# Altium PCB PCB1.PcbDoc (part 1 of 2)
Units mil, origin at the board's own origin, x right, y up, seen from the top; angles counter-clockwise.
Board outline 1771.65 x 629.92 mil, 4 copper layers (L1, L2, L3, L4), stack 61.583 mil thick; 35 components, 23 nets, 151 pads, 78 vias.
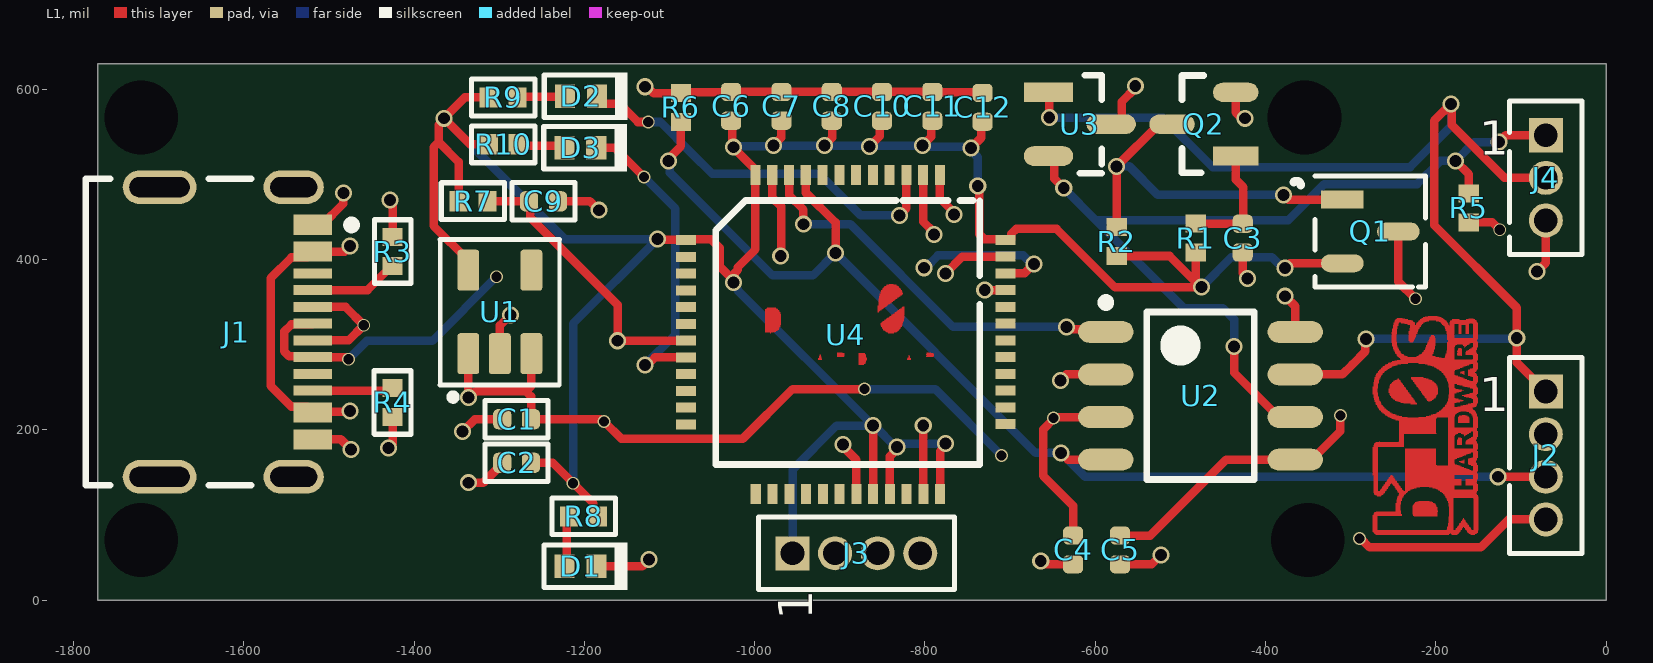
[diagram p0: L1 view]
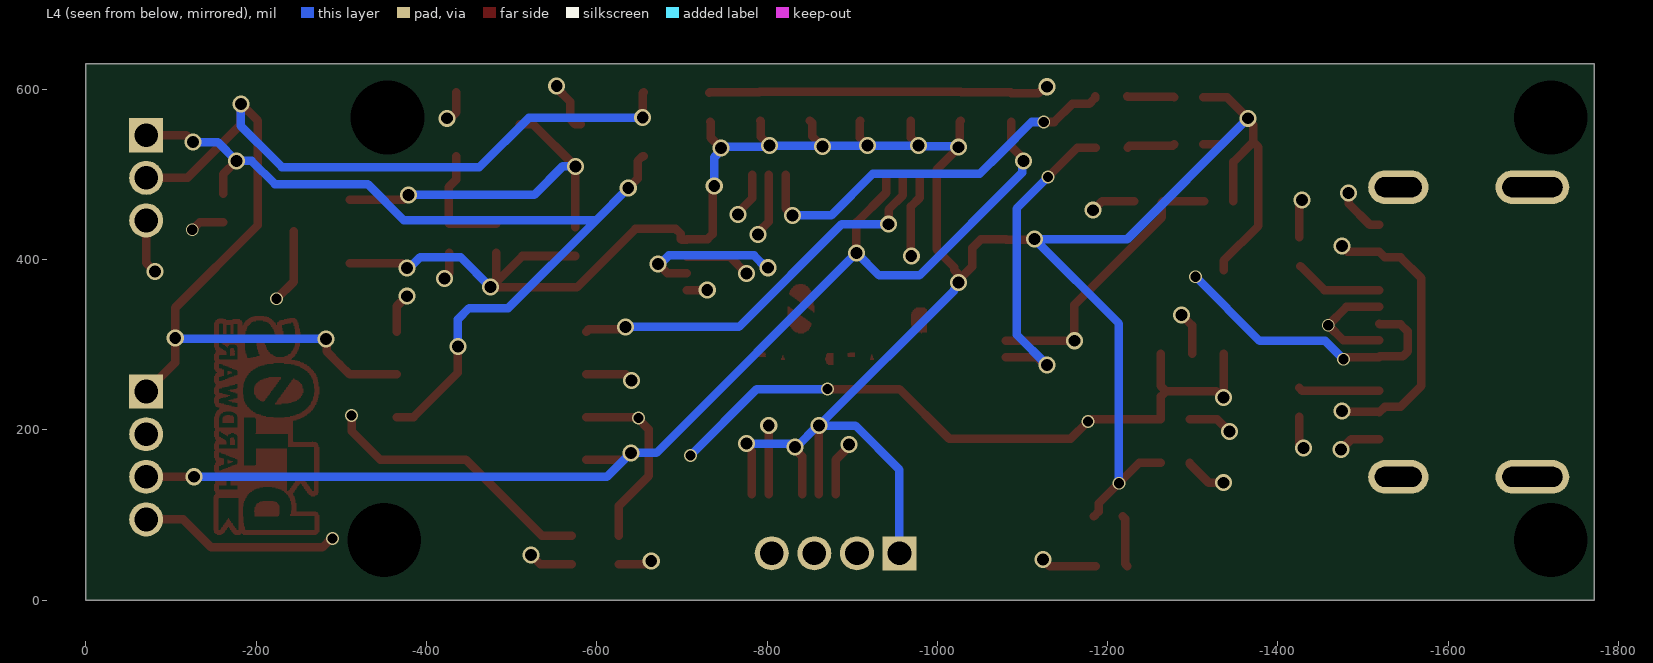
[diagram p1: L4 view, seen from below]
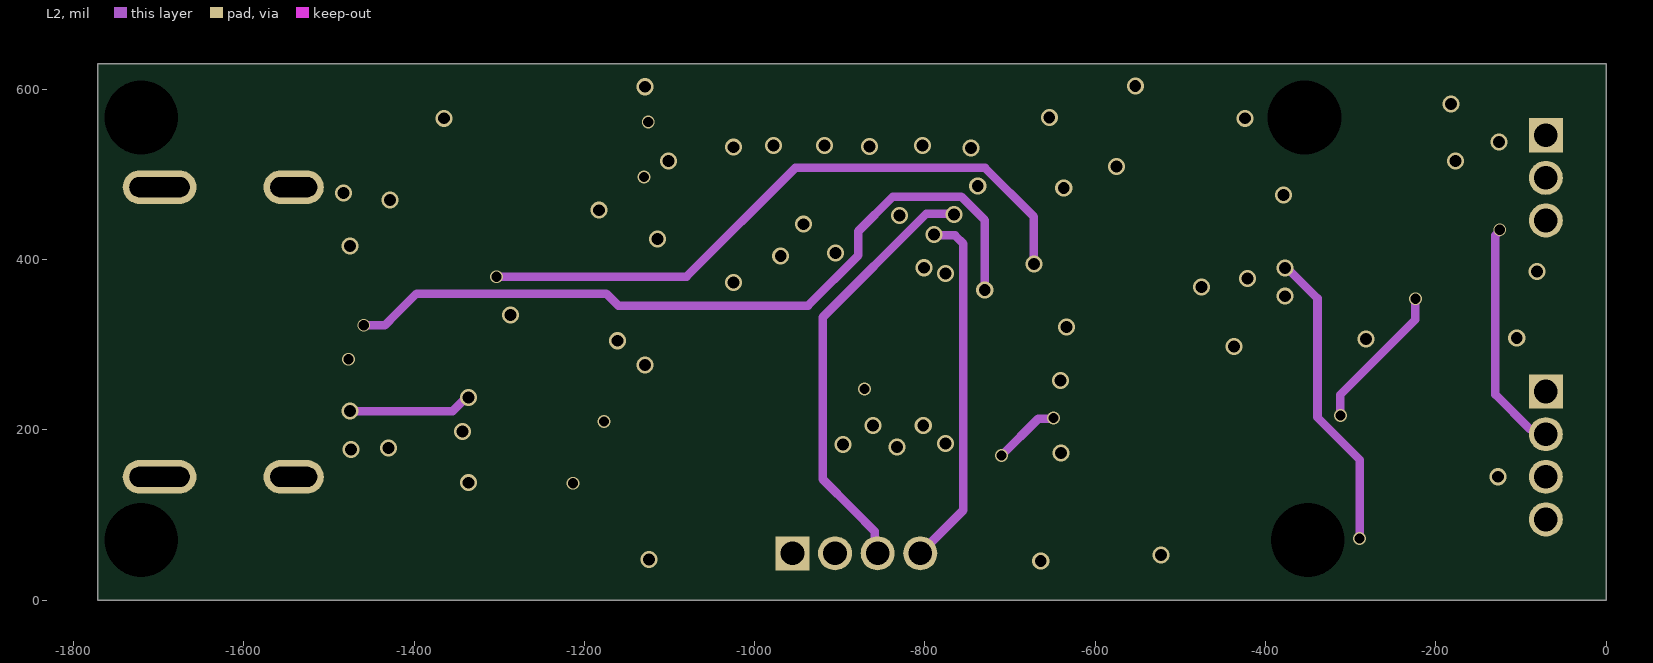
[diagram p2: L2]
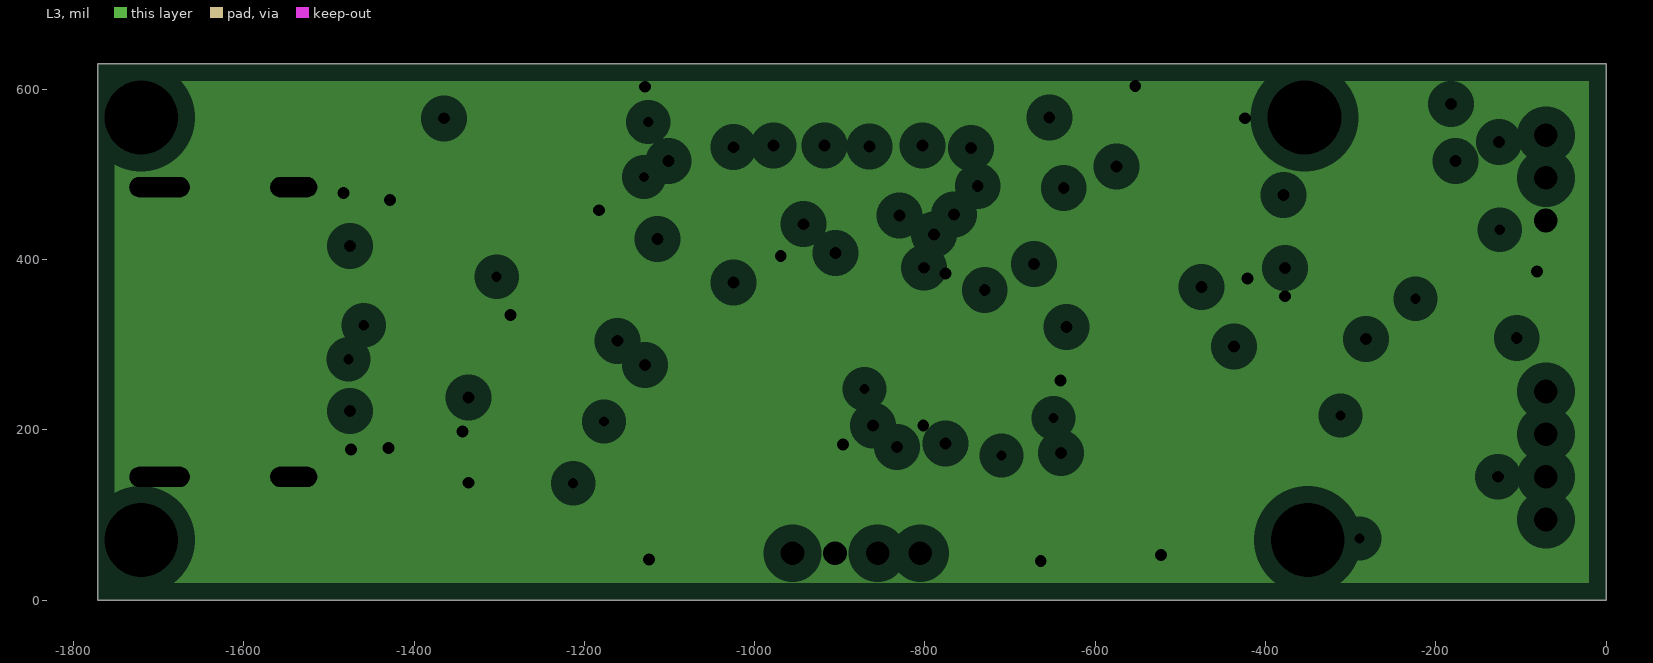
[diagram p3: L3, clearances drawn from the general rule]
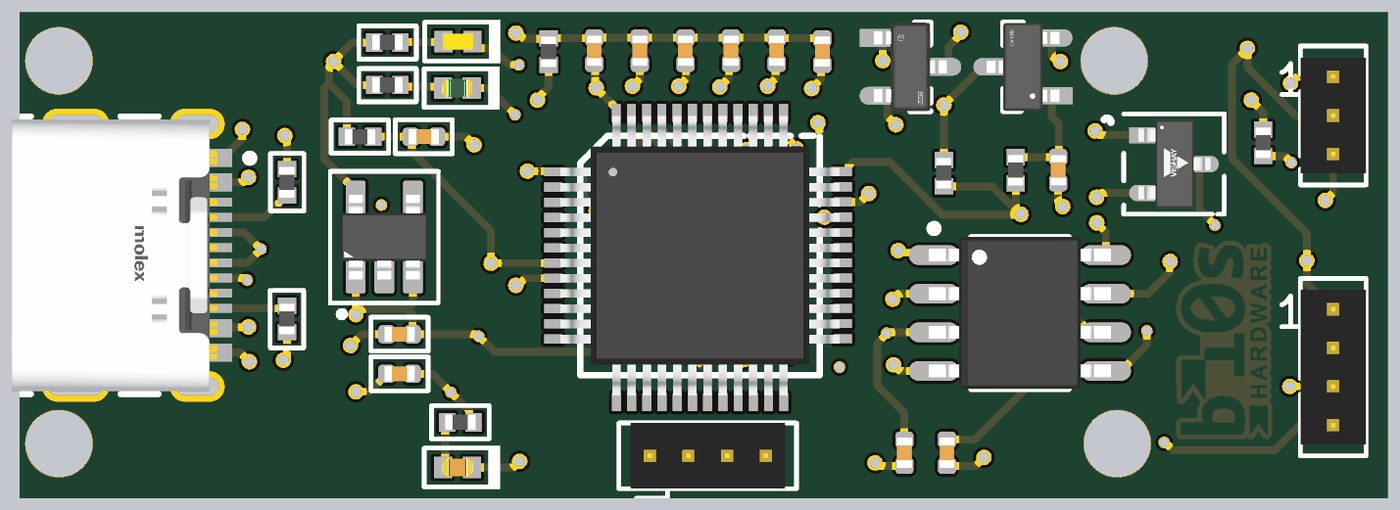
[diagram p4: 3D render of the assembled board from above, using the file's embedded part models]

## Layer stack, top to bottom
Top Solder: solder mask 0.4, Solder Resist, Dk 3.5
L1: signal copper 1.378
Dielectric 2: prepreg 3.9134, PP-006, Dk 4.1
L2: signal copper 0.5984
Dielectric 1: dielectric 49.8031, FR-4, Dk 4.8
L3: plane copper 0.5984, net GND
Dielectric 3: prepreg 3.9134, PP-006, Dk 4.1
L4: signal copper 1.378
Bottom Solder: solder mask 0.4, Solder Resist, Dk 3.5

## Board outline
-1771.65,0 -1771.65,629.92 0,629.92 0,0

## Design rules (kind name [scope] priority, off if disabled: settings)
Clearance Clearance_1 [WithinRoom('Stm32') or WithinRoom('Type C')] p1: gap=6 ignorepadtopadclearanceinfootprint=FALSE
Clearance [All] p2: gap=10 ignorepadtopadclearanceinfootprint=FALSE
PlaneClearance [All] p1: clearance=20
PlaneConnect [All] p1: planeconnectstyle=Relief reliefexpansion=20 reliefentries=4 reliefconductorwidth=10 reliefairgap=10
PolygonConnect [All] p1: connectstyle=Relief reliefconductorwidth=10 reliefentries=4 polygonreliefangle="90 Angle" airgapwidth=10
RoomDefinition "Type C" [False vs False] p1: confinementstyle=ConfineIn formatcopy=TRUE lockcomponents=FALSE outline -1570,509 -1421,509 -1421,127 -1570,127
RoomDefinition Stm32 [False vs False] p2: confinementstyle=ConfineIn formatcopy=TRUE lockcomponents=FALSE outline -1161.03,525 -655,525 -655,106 -1161.03,106
RoutingVias [All] p1: holewidth=28 width=50 viastyle="Through Hole" minholewidth=28 minwidth=50 maxholewidth=28 maxwidth=50
SolderMaskExpansion [All] p1: expansion=4 istentingtop=FALSE
SupplyNets "Schematic Supply Nets_3" [InNet('GND')] p1: voltage=0.000
SupplyNets "Schematic Supply Nets_2" [InNet('5V')] p2: voltage=0.000
SupplyNets "Schematic Supply Nets_1" [InNet('3.3V')] p3: voltage=0.000
SupplyNets "Schematic Supply Nets" [InNet('3.3V-CAN')] p4: voltage=0.000
Width [All] p1: maxlimit=10 minlimit=10 preferedwidth=10
28 further rules are at their usual default settings.

## Components (designator, comment, footprint, x,y, rotation, side; value= is the part's Value field where it differs from the comment)
C1 "1uF" CAPC1005X55N -1279.53,212.6 r0 top locked
C2 "1uF" CAPC1005X55N -1279.53,161.42 r0 top locked
C3 "22uF" CAPC1005X55N -426.82,425.2 r90 top
C4 "100nF" CAPC1005X55N -625.98,59.06 r90 top
C5 "100nF" CAPC1005X55N -570.87,59.06 r90 top
C6 "100nF" CAPC1005X55N -1027.56,580 r270 top
C7 "100nF" CAPC1005X55N -968.5,580 r270 top
C8 "100nF" CAPC1005X55N -909.45,580 r270 top
C9 "100nF" CAPC1005X55N -1248.03,468.5 r180 top locked
C10 "100nF" CAPC1005X55N -850.39,580 r270 top
C11 "100nF" CAPC1005X55N -791.34,580 r270 top
C12 "100nF" CAPC1005X55N -732.28,578.82 r270 top
D1 "RED" LED0402R -1204.57,39.98 r180 top locked
D2 "BLUE" LED0402B -1164.03,681.76 r180 top locked
D3 "GREEN" LED0402G -1204.72,531.5 r180 top locked
J1 "217179-0001" FP-2171790001-MFG -1653.54,314.96 r270 top locked
J2 "Header 4" HDR_1X4_1.27MM -70.87,244.96 r0 top
J3 "Header 4" HDR_1X4_1.27MM -955.51,55.12 r90 top locked
J4 "Header 3" HDR_1X3_1.27MM -70.87,546.06 r0 top
Q1 "SI2301" FP-S-03946-IPC_C -276.97,433.07 r0 top
Q2 "SS8050" FP-SS8050-G-IPC_B -472.44,559.06 r180 top
R1 "1M" RESC1005X37N -481.94,425.2 r270 top value=1MR
R2 "100K" RESC1005X37N -574.8,421.26 r270 top value=100kR
R3 "5K1" RESC1005X37N -1425.2,409.45 r90 top locked value=5.1kR
R4 "5K1" RESC1005X37N -1425.2,232.28 r270 top locked value=5.1kR
R5 "120R" RESC1005X37N -161.42,460.63 r270 top
R6 "10K" RESC1005X37N -1086.61,578.74 r90 top value=10kR
R7 "10K" RESC1005X37N -1330.71,468.5 r180 top locked value=10kR
R8 "1K" RESC1005X37N -1200.79,98.43 r180 top locked value=1kR
R9 "1K" RESC1005X37N -1295.28,590.55 r0 top locked value=1kR
R10 "1K" RESC1005X37N -1295.28,535.43 r0 top locked value=1kR
U1 "RT9013-33GB" RT9013-33GB -1299.21,338.58 r90 top locked
U2 "TJA1051T/3" NXP-SOIC-8_M -476.38,240.16 r0 top
U3 "ESDA6V1L-TP" FP-SOT-23-IPC_B -618.11,559.06 r0 top
U4 "STM32G431C8T6" STM32 -890.58,314.55 r0 top

## Footprints (in the part's own frame and the unit in brackets; to place one, negate y for a bottom-side part, rotate by r counter-clockwise, add the part's x,y. Pads: shape width x height; smd on the part's side, far side on the other; paste and mask are expansions set on the pad)
CAPC1005X55N [mm]
  rrect53% 0.54x0.6 smd: 1(-0.43,0) 2(0.43,0)
  silkscreen extent -0.94,-0.56 0.94,0.56, body extent -0.5,-0.25 0.5,0.25, height 0.55
FP-2171790001-MFG [mm]
  rect 0.6x1.15 smd paste+0 mask+0: A1B12(-3.2,3.425) A4B9(-2.4,3.425) B1A12(3.2,3.425) B4A9(2.4,3.425)
  rect 0.3x1.15 smd paste+0 mask+0: A5(-1.25,3.425) A6(-0.25,3.425) A7(0.25,3.425) A8(1.25,3.425) B5(1.75,3.425) B6(0.75,3.425) B7(-0.75,3.425) B8(-1.75,3.425)
  rrect100% 1x1.8 hole 1.4 slot 0.6 at 0 deg paste-2539.97 mask+0: S1(-4.32,2.85) S2(4.32,2.85)
  rrect100% 1x2.2 hole 1.8 slot 0.6 at 0 deg paste-2539.97 mask+0: S3(-4.32,-1.15) S4(4.32,-1.15)
  silkscreen extent -4.57,-3.35 4.57,4.7, body extent -4.92,-3.45 4.92,4.1, height 0.25
FP-S-03946-IPC_C [mm]
  rect 1.274x0.536 smd paste+0 mask+0: 1(-0.835,0.95)
  rrect100% 1.274x0.536 smd paste+0 mask+0: 2(-0.835,-0.95) 3(0.835,0)
  silkscreen extent -2.29,-1.65 1.65,1.65, body extent -1.57,-1.56 1.57,1.56, height 0.25
FP-SOT-23-IPC_B [mm]
  rect 1.474x0.585 smd paste+0 mask+0: 1(-0.935,0.95)
  rrect100% 1.474x0.585 smd paste+0 mask+0: 2(-0.935,-0.95) 3(0.935,0)
  silkscreen extent 0,-1.46 0.65,1.46, body extent -1.92,-1.71 1.92,1.71, height 0.25
FP-SS8050-G-IPC_B [mm]
  rect 1.357x0.572 smd paste+0 mask+0: 1(-0.951,0.95)
  rrect100% 1.357x0.572 smd paste+0 mask+0: 2(-0.951,-0.95) 3(0.951,0)
  silkscreen extent 0,-1.45 0.65,1.45, body extent -1.88,-1.7 1.88,1.7, height 0.25
HDR_1X3_1.27MM [mil]
  rect 40x40 hole 28: 1(0,0)
  round 40 hole 28: 2(0,-50) 3(0,-100)
  silkscreen extent -42,-140 42,40, body extent -42,-125 42,25, height 154
HDR_1X4_1.27MM [mil]
  rect 40x40 hole 28: 1(0,0)
  round 40 hole 28: 2(0,-50) 3(0,-100) 4(0,-150)
  silkscreen extent -42,-190 42,40, body extent -42,-175 42,25, height 154
LED0402B [mm]
  rect 0.6x0.7 smd: 1(0.541,2.286) 2(1.491,2.286)
  silkscreen extent -0.38,1.57 2.11,3, body extent 0.52,2.04 1.52,2.54, height 0.32
LED0402G [mm]
  rect 0.6x0.7 smd: 1(-0.475,0) 2(0.475,0)
  silkscreen extent -1.4,-0.71 1.09,0.71, body extent -0.5,-0.3 0.5,0.3, height 0.2
LED0402R [mm]
  rect 0.6x0.7 smd: 1(-0.475,0) 2(0.475,0)
  silkscreen extent -1.4,-0.71 1.09,0.71, body extent -0.5,-0.3 0.5,0.3, height 0.2
NXP-SOIC-8_M [mm] "SOIC, 8-Leads, Body 5x4mm, Pitch 1.27mm, IPC Low Density"
  oval 1.65x0.65 smd: 1(-2.825,1.905) 2(-2.825,0.635) 3(-2.825,-0.635) 4(-2.825,-1.905) 5(2.825,-1.905) 6(2.825,-0.635) 7(2.825,0.635) 8(2.825,1.905)
  silkscreen extent -2.95,-2.5 1.6,2.9, body extent -3,-2.5 3,2.5, height 1.75
RESC1005X37N [mm]
  rect 0.54x0.6 smd: 1(-0.432,0) 2(0.432,0)
  body extent -0.5,-0.25 0.5,0.25, height 0.37
RT9013-33GB [mm]
  rrect25% 1.22x0.65 smd: 1(-1.245,0.94) 2(-1.245,0) 3(-1.245,-0.94) 4(1.245,-0.94) 5(1.245,0.94)
  silkscreen extent -2.64,-1.78 2.16,1.78, body extent -1.4,-1.45 1.4,1.45, height 1.3
STM32 [mm]
  rect 0.6x0.3 smd: 1(-4.826,2.754) 2(-4.826,2.254) 3(-4.826,1.754) 4(-4.826,1.254) 5(-4.826,0.754) 6(-4.826,0.254) 7(-4.826,-0.246) 8(-4.826,-0.746) 9(-4.826,-1.246) 10(-4.826,-1.746) 11(-4.826,-2.246) 12(-4.826,-2.746) 25(4.699,-2.738) 26(4.699,-2.238) 27(4.699,-1.738) 28(4.699,-1.238) 29(4.699,-0.738) 30(4.699,-0.238) 31(4.699,0.262) 32(4.699,0.762) 33(4.699,1.262) 34(4.699,1.762) 35(4.699,2.262) 36(4.699,2.762)
  rect 0.3x0.6 smd: 13(-2.746,-4.826) 14(-2.246,-4.826) 15(-1.746,-4.826) 16(-1.246,-4.826) 17(-0.746,-4.826) 18(-0.246,-4.826) 19(0.254,-4.826) 20(0.754,-4.826) 21(1.254,-4.826) 22(1.754,-4.826) 23(2.254,-4.826) 24(2.754,-4.826) 37(2.746,4.699) 38(2.246,4.699) 39(1.746,4.699) 40(1.246,4.699) 41(0.746,4.699) 42(0.246,4.699) 43(-0.254,4.699) 44(-0.754,4.699) 45(-1.254,4.699) 47(-2.254,4.699) 48(-2.754,4.699) sS(-1.754,4.699)
  silkscreen extent -3.94,-3.94 3.94,3.94, body extent -4.6,-4.6 4.6,4.6, height 1.6

## Part data
C1 C2: "Ceramic Capacitor, Multilayer, Ceramic, 50V, 10% +Tol, 10% -Tol, X7R, 15% TC, 1uF, Surface Mount, 1206", Capacitor Type=Ceramic, Case/Package=1206, Manufacturer=KEMET, Manufacturer Part Number=C1206C105K5RACTU, Max Operating Temperature=125°C, Min Operating Temperature=-55°C, Package Shape=Rectangular, Package Style=SMTMeter, Rated DC Voltage (URdc)=50V, Supplier Part Number=399-C1206C105K5RAC7800CT-ND, Temperature Characteristics Code=X7R, Tolerance  (fill in as +-)=10%, Category="Ceramic Capacitors", ComponentLink1Description=https://datasheet.ciiva.com:443/pdfs/VipMasterIC/IC/KEME/KEME-S-A0008991654/KEME-S-A0008991654-1.pdf?src-supplier=IHS+Markit, ComponentLink1URL=https://datasheet.ciiva.com:443/pdfs/VipMasterIC/IC/KEME/KEME-S-A0008991654/KEME-S-A0008991654-1.pdf?src-supplier=IHS+Markit, ComponentLink2Description=https://datasheet.ciiva.com/6074/kem-c1002-x7r-smd-6074697.pdf?src-supplier=Farnell, ComponentLink2URL=https://datasheet.ciiva.com/6074/kem-c1002-x7r-smd-6074697.pdf?src-supplier=Farnell, ComponentLink3Description=https://datasheet.ciiva.com/7730/kem-c1002-x7r-smd-7730086.pdf?src-supplier=Element14, ComponentLink3URL=https://datasheet.ciiva.com/7730/kem-c1002-x7r-smd-7730086.pdf?src-supplier=Element14, ComponentLink4Description=https://datasheet.ciiva.com/22749/1918693-22749725.pdf?src-supplier=Element14, ComponentLink4URL=https://datasheet.ciiva.com/22749/1918693-22749725.pdf?src-supplier=Element14, Dielectric Material=Ceramic, Height=1mm, JESD-609 Code=e3, Length=3.2mm, Mounting Technology="Surface Mount", Multilayer=Yes, Packaging="Tape and Reel", Pins=2, Pricing="1=0.28, 10=0.182, 50=0.128, 100=0.1034, 500=0.07684, 1000=0.06724, 2500=0.06403, 5000=0.05923, 12500=0.05315, 25000=0.05123, 62500=0.04803, 125000=0.04242 (USD)", Reach SVHC Compliant=Yes, RoHS=Yes, RoHS Compliant=Yes, Stock=243208, Supplier=Digikey, Terminal Finish=Nickel, Termination=Wraparound, Tolerance (fill in as +-)=10%, Width=1.6mm
C3: "Ceramic Capacitor, Multilayer, Ceramic, 6.3V, 20% +Tol, 20% -Tol, X5R, 15% TC, 22uF, Surface Mount, 0805", Capacitor Type=Ceramic, Case/Package=0805, Manufacturer=Murata, Manufacturer Part Number=GRM21BR60J226ME39L, Max Operating Temperature=85°C, Min Operating Temperature=-55°C, Package Shape=Rectangular, Package Style=SMTMeter, Rated DC Voltage (URdc)=6.3V, Supplier Part Number=490-1719-1-ND, Temperature Characteristics Code=X5R, Tolerance  (fill in as +-)=20%, Category="Ceramic Capacitors", ComponentLink1Description=https://psearch.en.murata.com:443/capacitor/product/GRM21BR60J226ME39%23.pdf?src-supplier=IHS+Markit, ComponentLink1URL=https://psearch.en.murata.com:443/capacitor/product/GRM21BR60J226ME39%23.pdf?src-supplier=IHS+Markit, Dielectric Material=Ceramic, Height=1.25mm, JESD-609 Code=e3, Length=2mm, Mounting Technology="Surface Mount", Multilayer=Yes, Packaging="Tape and Reel", Pins=2, Pricing="1=0.34, 10=0.198, 50=0.1424, 100=0.1251, 500=0.0956, 1000=0.0864 (USD)", Reach SVHC Compliant=Yes, RoHS=Yes, RoHS Compliant=Yes, Stock=3492300, Supplier=Digikey, Terminal Finish=Nickel, Termination=Wraparound, Tolerance (fill in as +-)=20%, Width=1.25mm
C4 C5 C6 C7 C8 C9 C10 C11 C12: "Ceramic Capacitor, Multilayer, Ceramic, 10V, 10% +Tol, 10% -Tol, X5R, 15% TC, 0.1uF, Surface Mount, 0402", Capacitor Type=Ceramic, Case/Package=0402, Manufacturer=KEMET, Manufacturer Part Number=C0402C104K8PACTU, Max Operating Temperature=85°C, Min Operating Temperature=-55°C, Package Shape=Rectangular, Package Style=SMTMeter, Rated DC Voltage (URdc)=10V, Supplier Part Number=399-C0402C104K8PACTUCT-ND, Temperature Characteristics Code=X5R, Tolerance  (fill in as +-)=10%, Category="Ceramic Capacitors", ComponentLink1Description=https://datasheet.ciiva.com:443/pdfs/VipMasterIC/IC/KEME/KEME-S-A0008991665/KEME-S-A0008991665-1.pdf?src-supplier=IHS+Markit, ComponentLink1URL=https://datasheet.ciiva.com:443/pdfs/VipMasterIC/IC/KEME/KEME-S-A0008991665/KEME-S-A0008991665-1.pdf?src-supplier=IHS+Markit, ComponentLink2Description=https://datasheet.ciiva.com/144/docfinderpartnumber-c0402c104k8pactu-144097.pdf?src-supplier=Digikey, ComponentLink2URL=https://datasheet.ciiva.com/144/docfinderpartnumber-c0402c104k8pactu-144097.pdf?src-supplier=Digikey, ComponentLink3Description=https://datasheet.ciiva.com/7747/1776086-7747440.pdf?src-supplier=Element14, ComponentLink3URL=https://datasheet.ciiva.com/7747/1776086-7747440.pdf?src-supplier=Element14, ComponentLink4Description=https://datasheet.ciiva.com/28645/1789732-28645387.pdf?src-supplier=Element14, ComponentLink4URL=https://datasheet.ciiva.com/28645/1789732-28645387.pdf?src-supplier=Element14, ComponentLink5Description=https://datasheet.ciiva.com/14588/70095383-14588187.pdf?src-supplier=Allied+Electronics, ComponentLink5URL=https://datasheet.ciiva.com/14588/70095383-14588187.pdf?src-supplier=Allied+Electronics, ComponentLink6Description=https://datasheet.ciiva.com/14595/70095383-14595064.pdf?src-supplier=Allied+Electronics, ComponentLink6URL=https://datasheet.ciiva.com/14595/70095383-14595064.pdf?src-supplier=Allied+Electronics, Dielectric Material=Ceramic, Height=0.5mm, JESD-609 Code=e3, Length=1mm, Mounting Technology="Surface Mount", Multilayer=Yes, Packaging="Tape and Reel", Pins=2, Pricing="1=0.1, 10=0.035, 50=0.02, 100=0.0155, 500=0.01166, 1000=0.00917, 2500=0.00833, 5000=0.00767, 10000=0.007, 20000=0.00667, 30000=0.00633, 50000=0.00567, 100000=0.00458, 250000=0.00417 (USD)", Reach SVHC Compliant=Yes, RoHS=Yes, RoHS Compliant=Yes, Stock=507186, Supplier=Digikey, Terminal Finish=Nickel, Termination=Wraparound, Tolerance (fill in as +-)=10%, Width=0.5mm
D1: library part VLMS1500-GS08, "LED RED 0402 SMD", Color=Red, Forward Current=30mA, Forward Voltage=2.4V, LCSC Part Number=C511370, Manufacturer=Vishay, Max Operating Temperature=85°C, Min Operating Temperature=-30°C, Reverse Voltage-Max=5V, Supplier Part Number=VLMS1500-GS08CT-ND, Category=LEDs, Channels=1, Color@wavelength=Red, ComponentLink1Description=https://datasheet.ciiva.com:443/pdfs/VipMasterIC/IC/VISH/VISH-S-A0003457490/VISH-S-A0003457490-1.pdf?src-supplier=IHS+Markit, ComponentLink1URL=https://datasheet.ciiva.com:443/pdfs/VipMasterIC/IC/VISH/VISH-S-A0003457490/VISH-S-A0003457490-1.pdf?src-supplier=IHS+Markit, ComponentLink2Description=http://www.farnell.com/datasheets/1809983.pdf?src-supplier=Farnell, ComponentLink2URL=http://www.farnell.com/datasheets/1809983.pdf?src-supplier=Farnell, ComponentLink3Description=http://www.mouser.com/ds/2/427/vlmo1500-244705.pdf?src-supplier=Mouser, ComponentLink3URL=http://www.mouser.com/ds/2/427/vlmo1500-244705.pdf?src-supplier=Mouser, ComponentLink4Description=http://www.alliedelec.com/m/d/cfc385e1097fc985ee9a50a3551ac188.pdf?src-supplier=Allied+Electronics, ComponentLink4URL=http://www.alliedelec.com/m/d/cfc385e1097fc985ee9a50a3551ac188.pdf?src-supplier=Allied+Electronics, ComponentLink5Description=https://datasheet.octopart.com/VLMS1500-GS08-Vishay-datasheet-62332426.pdf?src-supplier=Newark, ComponentLink5URL=https://datasheet.octopart.com/VLMS1500-GS08-Vishay-datasheet-62332426.pdf?src-supplier=Newark, ComponentLink6Description=https://datasheet.octopart.com/VLMS1500-GS08-Vishay-datasheet-33014519.pdf?src-supplier=Element14, ComponentLink6URL=https://datasheet.octopart.com/VLMS1500-GS08-Vishay-datasheet-33014519.pdf?src-supplier=Element14, ComponentLink7Description=http://datasheet.octopart.com/VLMS1500-GS08-Vishay-datasheet-21227148.pdf?src-supplier=Avnet, ComponentLink7URL=http://datasheet.octopart.com/VLMS1500-GS08-Vishay-datasheet-21227148.pdf?src-supplier=Avnet, ComponentLink8Description=http://www.farnell.com/datasheets/1809983.pdf?src-supplier=Newark, ComponentLink8URL=http://www.farnell.com/datasheets/1809983.pdf?src-supplier=Newark, ComponentLink9Description=http://www.farnell.com/datasheets/2050839.pdf?src-supplier=Newark, ComponentLink9URL=http://www.farnell.com/datasheets/2050839.pdf?src-supplier=Newark, ComponentLink10Description=http://datasheet.octopart.com/VLMS1500-GS08-Vishay-datasheet-21227148.pdf?src-supplier=Quest, ComponentLink10URL=http://datasheet.octopart.com/VLMS1500-GS08-Vishay-datasheet-21227148.pdf?src-supplier=Quest, ComponentLink11Description=http://datasheet.octopart.com/VLMS1500-GS08-Vishay-datasheet-21227148.pdf?src-supplier=NAC+Semi, ComponentLink11URL=http://datasheet.octopart.com/VLMS1500-GS08-Vishay-datasheet-21227148.pdf?src-supplier=NAC+Semi, Luminous Intensity-Nom=54mcd, Manufacturer Part Number=VLMS1500-GS08, Mounting Technology="Surface Mount", Optoelectronic Device Type="SINGLE COLOR LED", Overall Height=0.35mm, Packaging="Tape and Reel", Pins=2, Pricing="1=0.34, 10=0.265, 100=0.119, 500=0.10746, 1000=0.08827, 3000=0.07676, 6000=0.06908, 15000=0.06141, 30000=0.05757, 75000=0.05181, 150000=0.04989 (USD)", Reach SVHC Compliant=Yes, RoHS=Yes, RoHS Compliant=Yes, Shape=Rectangular, Size=0.5mm, Stock=30781, Supplier=Digikey, Terminal Pitch=0.95mm, Viewing Angle=130°
D2: library part VLMB1500-GS08, "Single Color LED, Blue, 0.5mm", Color=Blue, Forward Current=30mA, Forward Voltage=3.15V, Manufacturer=Vishay, Max Operating Temperature=85°C, Min Operating Temperature=-30°C, Supplier Part Number=VLMB1500-GS08CT-ND, Category=LEDs, Channels=1, Color@wavelength=Blue, ComponentLink1Description=https://datasheet.ciiva.com:443/pdfs/VipMasterIC/IC/VISH/VISH-S-A0003457490/VISH-S-A0003457490-1.pdf?src-supplier=IHS+Markit, ComponentLink1URL=https://datasheet.ciiva.com:443/pdfs/VipMasterIC/IC/VISH/VISH-S-A0003457490/VISH-S-A0003457490-1.pdf?src-supplier=IHS+Markit, ComponentLink2Description=https://datasheet.ciiva.com/30005/vlmo1500-30005132.pdf?src-supplier=Avnet, ComponentLink2URL=https://datasheet.ciiva.com/30005/vlmo1500-30005132.pdf?src-supplier=Avnet, JESD-609 Code=e3, Luminous Intensity-Nom=28.1mcd, Manufacturer Part Number=VLMB1500-GS08, Mounting Technology="Surface Mount", Optoelectronic Device Type="SINGLE COLOR LED", Overall Height=0.35mm, Packaging="Tape and Reel", Pins=2, Pricing="1=0.39, 10=0.307, 100=0.1378, 500=0.12444, 1000=0.10221, 3000=0.08888, 6000=0.07999, 15000=0.0711, 30000=0.06666, 75000=0.05999, 150000=0.05777 (USD)", Reach SVHC Compliant=Yes, RoHS=Yes, RoHS Compliant=Yes, Shape=Rectangular, Size=0.5mm, Stock=37691, Supplier=Digikey, Terminal Finish=Tin, Terminal Pitch=0.95mm, Viewing Angle=130°
D3: library part VLMG1500-GS08, "LED YLW-GRN 0402 SMD", Color=Green,Yellow, Color@wavelength=Green, Forward Current=30mA, Forward Voltage=2.4V, LCSC Part Number=C511404, Manufacturer=Vishay, Max Operating Temperature=85°C, Min Operating Temperature=-30°C, Reverse Voltage-Max=5V, Supplier Part Number=VLMG1500-GS08CT-ND, Category=LEDs, Channels=1, ComponentLink1Description=https://datasheet.ciiva.com:443/pdfs/VipMasterIC/IC/VISH/VISH-S-A0003457490/VISH-S-A0003457490-1.pdf?src-supplier=IHS+Markit, ComponentLink1URL=https://datasheet.ciiva.com:443/pdfs/VipMasterIC/IC/VISH/VISH-S-A0003457490/VISH-S-A0003457490-1.pdf?src-supplier=IHS+Markit, ComponentLink2Description=https://datasheet.ciiva.com/12071/vlmo1500-244705-12071911.pdf?src-supplier=Mouser, ComponentLink2URL=https://datasheet.ciiva.com/12071/vlmo1500-244705-12071911.pdf?src-supplier=Mouser, ComponentLink3Description=https://datasheet.ciiva.com/30005/vlmo1500-30005134.pdf?src-supplier=Avnet, ComponentLink3URL=https://datasheet.ciiva.com/30005/vlmo1500-30005134.pdf?src-supplier=Avnet, Luminous Intensity-Nom=90mcd, Manufacturer Part Number=VLMG1500-GS08, Mounting Technology="Surface Mount", Optoelectronic Device Type="SINGLE COLOR LED", Overall Height=0.35mm, Packaging="Tape and Reel", Pins=2, Pricing="1=0.34, 10=0.265, 100=0.119, 500=0.10746, 1000=0.08827 (USD)", Reach SVHC Compliant=Yes, RoHS=Yes, RoHS Compliant=Yes, Shape=Rectangular, Size=0.5mm, Stock=93157, Supplier=Digikey, Terminal Pitch=0.95mm, Viewing Angle=130°
J1: "CONN RCP USB2.0 TYP C 24P SMD RA", LCSC Part Number=C3197684, Manufacturer=Molex, Supplier Part Number=900-2171790001CT-ND, Category="USB Connectors", Manufacturer Part Number=217179-0001, Pricing="1=0.9, 10=0.745, 100=0.6212 (USD)", RoHS=No, Stock=14149, Supplier=Digikey
J2 J3: library part FTS-104-01-F-S, Flammability Rating="UL94 V-0", Manufacturer=Samtec, Manufacturer Series=FTS, Supplier Part Number=FTS-104-01-F-S-ND, Additional Feature="Low Profile", Category=Connectors, ComponentLink1Description=https://datasheet.ciiva.com:443/pdfs/VipMasterIC/IC/SAMI/SAMI-S-A0001504673/SAMI-S-A0001504673-1.pdf?src-supplier=IHS+Markit, ComponentLink1URL=https://datasheet.ciiva.com:443/pdfs/VipMasterIC/IC/SAMI/SAMI-S-A0001504673/SAMI-S-A0001504673-1.pdf?src-supplier=IHS+Markit, ComponentLink2Description=https://datasheet.octopart.com/FTS-104-01-F-S-Samtec-datasheet-151470456.pdf?src-supplier=Farnell, ComponentLink2URL=https://datasheet.octopart.com/FTS-104-01-F-S-Samtec-datasheet-151470456.pdf?src-supplier=Farnell, ComponentLink3Description=http://www.samtec.com/documents/webfiles/pdf/FTS.pdf?src-supplier=Avnet, ComponentLink3URL=http://www.samtec.com/documents/webfiles/pdf/FTS.pdf?src-supplier=Avnet, Connector Type="BOARD CONNECTOR", Contact Finish - Mating="GOLD (3) OVER NICKEL (50)", Contact Finish - Termination="Matte Tin (Sn) - with Nickel (Ni) barrier", Contact Gender=Male, Contact Material=Bronze, DIN Conformance=No, Filter Feature=No, IEC Conformance=No, JESD-609 Code=e3, Manufacturer Part Number=FTS-104-01-F-S, MIL Conformance=No, Mixed Contacts=No, Mounting Style=STRAIGHT, Mounting Technology=Board, Number of Contacts=4, Number of Rows Loaded=1, Option="General Purpose", Pricing="1=0.81, 50=0.7086, 100=0.6004, 500=0.4993, 1000=0.4375 (USD)", Reach SVHC Compliant=Yes, RoHS=Yes, RoHS Compliant=Yes, Stock=197, Supplier=Digikey, Terminal Pitch=1.27mm, Termination=Solder
J4: library part FTS-103-01-F-S, Flammability Rating="UL94 V-0", Manufacturer=Samtec, Manufacturer Series=FTS, Supplier Part Number=612-FTS-103-01-F-S-ND, Additional Feature="Low Profile", Category=Connectors, ComponentLink1Description=https://datasheet.ciiva.com:443/pdfs/VipMasterIC/IC/SAMI/SAMI-S-A0001504673/SAMI-S-A0001504673-1.pdf?src-supplier=IHS+Markit, ComponentLink1URL=https://datasheet.ciiva.com:443/pdfs/VipMasterIC/IC/SAMI/SAMI-S-A0001504673/SAMI-S-A0001504673-1.pdf?src-supplier=IHS+Markit, ComponentLink2Description=http://suddendocs.samtec.com/prints/fts-1xx-xx-xx-xx-xx-mkt.pdf?src-supplier=Digikey, ComponentLink2URL=http://suddendocs.samtec.com/prints/fts-1xx-xx-xx-xx-xx-mkt.pdf?src-supplier=Digikey, ComponentLink3Description=http://www.samtec.com/documents/webfiles/pdf/FTS.pdf?src-supplier=Avnet, ComponentLink3URL=http://www.samtec.com/documents/webfiles/pdf/FTS.pdf?src-supplier=Avnet, ComponentLink4Description=https://datasheet.octopart.com/FTS-103-01-F-S-Samtec-datasheet-116535195.pdf?src-supplier=Toby+Electronics, ComponentLink4URL=https://datasheet.octopart.com/FTS-103-01-F-S-Samtec-datasheet-116535195.pdf?src-supplier=Toby+Electronics, ComponentLink5Description=https://datasheet.octopart.com/FTS-103-01-F-S-Samtec-datasheet-151470456.pdf?src-supplier=Sager+Electronics, ComponentLink5URL=https://datasheet.octopart.com/FTS-103-01-F-S-Samtec-datasheet-151470456.pdf?src-supplier=Sager+Electronics, Connector Type="BOARD CONNECTOR", Contact Finish - Mating="GOLD (3) OVER NICKEL (50)", Contact Finish - Termination="Matte Tin (Sn) - with Nickel (Ni) barrier", Contact Gender=Male, Contact Material=Bronze, DIN Conformance=No, Filter Feature=No, IEC Conformance=No, JESD-609 Code=e3, Manufacturer Part Number=FTS-103-01-F-S, MIL Conformance=No, Mixed Contacts=No, Mounting Style=STRAIGHT, Mounting Technology=Board, Number of Contacts=3, Number of Rows Loaded=1, Option="General Purpose", Pricing="1=0.73, 50=0.6378, 100=0.5407, 500=0.4491, 1000=0.4 (USD)", Reach SVHC Compliant=Yes, RoHS=Yes, RoHS Compliant=Yes, Stock=2922, Supplier=Digikey, Terminal Pitch=1.27mm, Termination=Solder
Q1: library part SI2301BDS-T1-GE3, "Small Signal Field-Effect Transistor, 2.2A I(D), 20V, 1-Element, P-Channel, Silicon, Metal-oxide Semiconductor FET, TO-236AB", Drain Current-Max (Abs) (ID)=2.2A, Drain-source On Resistance-Max=100mR, DS Breakdown Voltage-Min=20V, Manufacturer="Vishay Siliconix", Max Operating Temperature=150°C, Operating Mode="ENHANCEMENT MODE", Package Body Material=Plastic, Package Shape=Rectangular, Package Style="SMALL OUTLINEMeter", Peak Reflow Temperature (Cel)=260°C, Power Dissipation-Max (Abs)=900mW, Supplier Part Number=SI2301BDS-T1-GE3CT-ND, Time @ Peak Reflow Temperature-Max (s)=30s, Category=MOSFETs, ComponentLink1Description=https://datasheet.ciiva.com:443/pdfs/VipMasterIC/IC/VISH/VISHS84963/VISHS84963-1.pdf?src-supplier=IHS+Markit, ComponentLink1URL=https://datasheet.ciiva.com:443/pdfs/VipMasterIC/IC/VISH/VISHS84963/VISHS84963-1.pdf?src-supplier=IHS+Markit, ComponentLink2Description=https://datasheet.ciiva.com/11160/si2301bds-11160977.pdf?src-supplier=Avnet, ComponentLink2URL=https://datasheet.ciiva.com/11160/si2301bds-11160977.pdf?src-supplier=Avnet, ComponentLink3Description=https://datasheet.ciiva.com/7789/si2301bds-7789014.pdf?src-supplier=Element14, ComponentLink3URL=https://datasheet.ciiva.com/7789/si2301bds-7789014.pdf?src-supplier=Element14, ComponentLink4Description=https://datasheet.ciiva.com/944/si2301bds-944179.pdf?src-supplier=Digikey, ComponentLink4URL=https://datasheet.ciiva.com/944/si2301bds-944179.pdf?src-supplier=Digikey, ComponentLink5Description=https://datasheet.ciiva.com/16486/si2301bds-16486235.pdf?src-supplier=Future+Electronics, ComponentLink5URL=https://datasheet.ciiva.com/16486/si2301bds-16486235.pdf?src-supplier=Future+Electronics, Drain Current-Max (ID)=2.2A, FET Technology="METAL-OXIDE SEMICONDUCTOR", JEDEC-95 Code=TO-236AB, JESD-30 Code=R-PDSO-G3, JESD-609 Code=e3, Manufacturer Part Number=SI2301BDS-T1-GE3, Moisture Sensitivity Level=1, Number of Elements=1, Pins=3, Polarity/Channel Type=P-CHANNEL, Pricing="1=0.76, 10=0.472, 100=0.2632, 500=0.2151, 1000=0.18617 (USD)", Qualification Status="Not Qualified", Reach SVHC Compliant=Yes, RoHS=Yes, RoHS Compliant=Yes, Stock=20019, Supplier=Digikey, Surface Mount=Yes, Terminal Finish=Tin, Terminal Form="Gull Wing", Terminal Position=DUAL, Transistor Element Material=SILICON
Q2: "Small Signal Bipolar Transistor, 1.5A I(C), 25V V(BR)CEO, 1-Element, NPN, Silicon, TO-92", Collector-emitter Voltage-Max=25V, DC Current Gain-Min (hFE)=160, Frequency=190MHz, Manufacturer="ON Semiconductor / Fairchild", Manufacturer Part Number=SS8050DBU, Max Collector Current=1.5A, Max Operating Temperature=150°C, Package Body Material=Plastic, Package Shape=Round, Package Style=CYLINDRICALMeter, Power Dissipation-Max (Abs)=1W, Supplier Part Number=SS8050DBU-ND, Category=BJTs, ComponentLink1Description=https://datasheet.ciiva.com:443/pdfs/VipMasterIC/IC/ONSM/ONSM-S-A0003589354/ONSM-S-A0003589354-1.pdf?src-supplier=IHS+Markit, ComponentLink1URL=https://datasheet.ciiva.com:443/pdfs/VipMasterIC/IC/ONSM/ONSM-S-A0003589354/ONSM-S-A0003589354-1.pdf?src-supplier=IHS+Markit, ComponentLink2Description=https://datasheet.ciiva.com/19482/1090757-19482669.pdf?src-supplier=Jameco, ComponentLink2URL=https://datasheet.ciiva.com/19482/1090757-19482669.pdf?src-supplier=Jameco, ComponentLink3Description=https://datasheet.ciiva.com/46415/1868828-46415607.pdf?src-supplier=Element14, ComponentLink3URL=https://datasheet.ciiva.com/46415/1868828-46415607.pdf?src-supplier=Element14, ComponentLink4Description=https://datasheet.ciiva.com/4722/ss8050-117753-4722682.pdf?src-supplier=Mouser, ComponentLink4URL=https://datasheet.ciiva.com/4722/ss8050-117753-4722682.pdf?src-supplier=Mouser, ComponentLink5Description=https://datasheet.ciiva.com/979/ss8050-979045.pdf?src-supplier=Digikey, ComponentLink5URL=https://datasheet.ciiva.com/979/ss8050-979045.pdf?src-supplier=Digikey, ComponentLink6Description=https://datasheet.ciiva.com/11201/ss8050-11201596.pdf?src-supplier=Avnet, ComponentLink6URL=https://datasheet.ciiva.com/11201/ss8050-11201596.pdf?src-supplier=Avnet, JEDEC-95 Code=TO-92, JESD-30 Code=O-PBCY-T3, Number of Elements=1, Pins=3, Polarity/Channel Type=NPN, Pricing="1=0.42, 10=0.322, 100=0.1933, 500=0.17902, 1000=0.12174, 2000=0.11207, 5000=0.10741, 10000=0.09667, 50000=0.08951 (USD)", Qualification Status="Not Qualified", Reach SVHC Compliant=Yes, RoHS=Yes, RoHS Compliant=Yes, Stock=3759, Supplier=Digikey, Surface Mount=No, Terminal Form="Through Hole", Terminal Position=BOTTOM, Transistor Application=AMPLIFIER, Transistor Element Material=SILICON
R1: "Fixed Resistor, Metal Glaze/thick Film, 0.1W, 1000000ohm, 75V, 1% +/-Tol, 100ppm/Cel, Surface Mount, 0603", Case/Package=0603, Manufacturer=Panasonic, Manufacturer Part Number=ERJ-3EKF1004V, Max Operating Temperature=155°C, Min Operating Temperature=-55°C, Package Height=0.45mm, Package Length=1.6mm, Package Shape=Rectangular, Package Style=SMTMeter, Package Width=0.8mm, Power=100mW, Rated Temperature=70°C, Resistor Type="FIXED RESISTOR", Supplier Part Number=P1.00MHDKR-ND, Temperature Coefficient=100ppm/°C, Tolerance=1%, Working Voltage=75V, Category="Chip SMD Resistors", ComponentLink1Description=https://datasheet.ciiva.com:443/pdfs/VipMasterIC/IC/PANA/PANA-S-A0009889626/PANA-S-A0009889626-1.pdf?src-supplier=IHS+Markit, ComponentLink1URL=https://datasheet.ciiva.com:443/pdfs/VipMasterIC/IC/PANA/PANA-S-A0009889626/PANA-S-A0009889626-1.pdf?src-supplier=IHS+Markit, ComponentLink2Description=http://www.farnell.com/datasheets/1911175.pdf?src-supplier=Farnell, ComponentLink2URL=http://www.farnell.com/datasheets/1911175.pdf?src-supplier=Farnell, ComponentLink3Description=http://www.farnell.com/datasheets/1678782.pdf?src-supplier=Farnell, ComponentLink3URL=http://www.farnell.com/datasheets/1678782.pdf?src-supplier=Farnell, ComponentLink4Description=http://www.mouser.com/ds/2/315/AOA0000CE2-37512.pdf?src-supplier=Mouser, ComponentLink4URL=http://www.mouser.com/ds/2/315/AOA0000CE2-37512.pdf?src-supplier=Mouser, ComponentLink5Description=http://www.alliedelec.com/m/d/623f45ff1957d936ff56d46fd1c28cac.pdf?src-supplier=Allied+Electronics, ComponentLink5URL=http://www.alliedelec.com/m/d/623f45ff1957d936ff56d46fd1c28cac.pdf?src-supplier=Allied+Electronics, ComponentLink6Description=http://components.arrow.com/part/dataview/3985224S9849817N1386?src-supplier=Arrow+Electronics, ComponentLink6URL=http://components.arrow.com/part/dataview/3985224S9849817N1386?src-supplier=Arrow+Electronics, ComponentLink7Description=https://datasheet.octopart.com/ERJ-3EKF1004V-Panasonic-datasheet-10025800.pdf?src-supplier=Element14, ComponentLink7URL=https://datasheet.octopart.com/ERJ-3EKF1004V-Panasonic-datasheet-10025800.pdf?src-supplier=Element14, ComponentLink8Description=https://datasheet.octopart.com/ERJ-3EKF1004V-Panasonic-datasheet-136608610.pdf?src-supplier=Farnell, ComponentLink8URL=https://datasheet.octopart.com/ERJ-3EKF1004V-Panasonic-datasheet-136608610.pdf?src-supplier=Farnell, ComponentLink9Description=http://www.farnell.com/datasheets/1911175.pdf?src-supplier=Element14, ComponentLink9URL=http://www.farnell.com/datasheets/1911175.pdf?src-supplier=Element14, ComponentLink10Description=http://www.farnell.com/datasheets/1911175.pdf?src-supplier=Newark, ComponentLink10URL=http://www.farnell.com/datasheets/1911175.pdf?src-supplier=Newark, ComponentLink11Description=http://industrial.panasonic.com/cdbs/www-data/pdf/RDA0000/AOA0000C304.pdf?src-supplier=Newark, ComponentLink11URL=http://industrial.panasonic.com/cdbs/www-data/pdf/RDA0000/AOA0000C304.pdf?src-supplier=Newark, ComponentLink12Description=https://datasheet.octopart.com/ERJ-3EKF1004V-Panasonic-datasheet-48891056.pdf?src-supplier=Newark, ComponentLink12URL=https://datasheet.octopart.com/ERJ-3EKF1004V-Panasonic-datasheet-48891056.pdf?src-supplier=Newark, Construction=Rectangular, JESD-609 Code=e3, Mounting Technology="Surface Mount", Packaging="Tape and Reel", Pins=2, Pricing="1=0.1, 10=0.03, 50=0.0194, 100=0.0163, 500=0.01132, 1000=0.0098 (USD)", Reach SVHC Compliant=Yes, Reference Standard=AEC-Q200, RoHS=Yes, RoHS Compliant=Yes, Stock=334097, Supplier=Digikey, Technology="METAL GLAZE/THICK FILM", Terminal Finish=Nickel, Termination=Wraparound
R2: "NTC Thermistor, 100000ohm, Surface Mount", Manufacturer="Vishay BCcomponents", Manufacturer Part Number=NTCS0603E3104GXT, Max Operating Temperature=150°C, Min Operating Temperature=-40°C, Package Shape=Rectangular, Power=125mW, Rated Temperature=25°C, Resistor Type="NTC THERMISTOR", Supplier Part Number=BC2476CT-ND, Tolerance=2%, Category=Thermistors, ComponentLink1Description=https://datasheet.ciiva.com:443/pdfs/VipMasterIC/IC/BEYS/BEYSS04817/BEYSS04817-1.pdf?src-supplier=IHS+Markit, ComponentLink1URL=https://datasheet.ciiva.com:443/pdfs/VipMasterIC/IC/BEYS/BEYSS04817/BEYSS04817-1.pdf?src-supplier=IHS+Markit, ComponentLink2Description=https://datasheet.ciiva.com/2848/ntcs0603-2848786.pdf?src-supplier=Digikey, ComponentLink2URL=https://datasheet.ciiva.com/2848/ntcs0603-2848786.pdf?src-supplier=Digikey, ComponentLink3Description=https://datasheet.ciiva.com/2848/ntcs0603-2848787.pdf?src-supplier=Digikey, ComponentLink3URL=https://datasheet.ciiva.com/2848/ntcs0603-2848787.pdf?src-supplier=Digikey, ComponentLink4Description=https://datasheet.ciiva.com/2848/ntcs0603-2848785.pdf?src-supplier=Digikey, ComponentLink4URL=https://datasheet.ciiva.com/2848/ntcs0603-2848785.pdf?src-supplier=Digikey, ComponentLink5Description=https://datasheet.ciiva.com/8695/ntcs0603-8695743.pdf?src-supplier=Avnet, ComponentLink5URL=https://datasheet.ciiva.com/8695/ntcs0603-8695743.pdf?src-supplier=Avnet, JESD-609 Code=e3, Manufacturer Series=NTCS0603E3104GXT, Mounting Technology="Surface Mount", Packaging="Tape and Reel", Pins=2, Pricing="1=0.94, 10=0.716, 25=0.6168, 50=0.5948, 100=0.5067, 500=0.44064, 1000=0.38555 (USD)", Reach SVHC Compliant=Yes, RoHS=Yes, RoHS Compliant=Yes, Stock=40222, Supplier=Digikey, Terminal Finish=Tin, Terminal Placement="Dual Ended", Termination=Wraparound, Thermistor Application="OVERLOAD PROTECTION"
R3: "RES SMD 5.1K OHM 1% 1/16W 0402", Case/Package=0402, LCSC Part Number=C144745, Manufacturer=Yageo, Manufacturer Part Number=AC0402FR-075K1L, Max Operating Temperature=155°C, Min Operating Temperature=-55°C, Package Height=0.32mm, Package Length=1mm, Package Shape=Rectangular, Package Style=SMTMeter, Package Width=0.5mm, Power=62.5mW, Rated Temperature=70°C, Resistor Type="FIXED RESISTOR", Supplier Part Number=YAG3503CT-ND, Temperature Coefficient=100ppm/°C, Tolerance=1%, Working Voltage=50V, Additional Feature="LASER TRIMMABLE", Category="Chip SMD Resistors", ComponentLink1Description=https://datasheet.ciiva.com:443/pdfs/VipMasterIC/IC/YAGO/YAGO-S-A0003597364/YAGO-S-A0003597364-1.pdf?src-supplier=IHS+Markit, ComponentLink1URL=https://datasheet.ciiva.com:443/pdfs/VipMasterIC/IC/YAGO/YAGO-S-A0003597364/YAGO-S-A0003597364-1.pdf?src-supplier=IHS+Markit, ComponentLink2Description=https://datasheet.octopart.com/AC0402FR-075K1L-Yageo-datasheet-166720450.pdf?src-supplier=Future+Electronics, ComponentLink2URL=https://datasheet.octopart.com/AC0402FR-075K1L-Yageo-datasheet-166720450.pdf?src-supplier=Future+Electronics, ComponentLink3Description=http://www.yageo.com/documents/recent/PYu-AC_51_RoHS_L_2_revised.pdf?src-supplier=Future+Electronics, ComponentLink3URL=http://www.yageo.com/documents/recent/PYu-AC_51_RoHS_L_2_revised.pdf?src-supplier=Future+Electronics, Construction=Chip, JESD-609 Code=e3, Mounting Technology="Surface Mount", Packaging="Tape and Reel", Pins=2, Pricing="1=0.1, 10=0.019, 50=0.0116, 100=0.0095, 500=0.00638, 1000=0.00544, 5000=0.00391 (USD)", Reach SVHC Compliant=Yes, Reference Standard=AEC-Q200, RoHS=Yes, RoHS Compliant=Yes, Stock=82072, Supplier=Digikey, Technology="METAL GLAZE/THICK FILM", Terminal Finish=Nickel, Termination=Wraparound
R4: library part AC0402FR-075K1L, "RES SMD 5.1K OHM 1% 1/16W 0402", Case/Package=0402, LCSC Part Number=C144745, Manufacturer=Yageo, Max Operating Temperature=155°C, Min Operating Temperature=-55°C, Package Height=0.32mm, Package Length=1mm, Package Shape=Rectangular, Package Style=SMTMeter, Package Width=0.5mm, Power=62.5mW, Rated Temperature=70°C, Resistor Type="FIXED RESISTOR", Supplier Part Number=YAG3503CT-ND, Temperature Coefficient=100ppm/°C, Tolerance=1%, Working Voltage=50V, Additional Feature="LASER TRIMMABLE", Category="Chip SMD Resistors", ComponentLink1Description=https://datasheet.ciiva.com:443/pdfs/VipMasterIC/IC/YAGO/YAGO-S-A0003597364/YAGO-S-A0003597364-1.pdf?src-supplier=IHS+Markit, ComponentLink1URL=https://datasheet.ciiva.com:443/pdfs/VipMasterIC/IC/YAGO/YAGO-S-A0003597364/YAGO-S-A0003597364-1.pdf?src-supplier=IHS+Markit, ComponentLink2Description=https://datasheet.octopart.com/AC0402FR-075K1L-Yageo-datasheet-166720450.pdf?src-supplier=Future+Electronics, ComponentLink2URL=https://datasheet.octopart.com/AC0402FR-075K1L-Yageo-datasheet-166720450.pdf?src-supplier=Future+Electronics, ComponentLink3Description=http://www.yageo.com/documents/recent/PYu-AC_51_RoHS_L_2_revised.pdf?src-supplier=Future+Electronics, ComponentLink3URL=http://www.yageo.com/documents/recent/PYu-AC_51_RoHS_L_2_revised.pdf?src-supplier=Future+Electronics, Construction=Chip, JESD-609 Code=e3, Manufacturer Part Number=AC0402FR-075K1L, Mounting Technology="Surface Mount", Packaging="Tape and Reel", Pins=2, Pricing="1=0.1, 10=0.019, 50=0.0116, 100=0.0095, 500=0.00638, 1000=0.00544, 5000=0.00391 (USD)", Reach SVHC Compliant=Yes, Reference Standard=AEC-Q200, RoHS=Yes, RoHS Compliant=Yes, Stock=82072, Supplier=Digikey, Technology="METAL GLAZE/THICK FILM", Terminal Finish=Nickel, Termination=Wraparound
R5: "Fixed Resistor, Metal Glaze/thick Film, 0.063W, 120ohm, 50V, 1% +/-Tol, 100ppm/Cel, Surface Mount, 0402", Case/Package=0402, Manufacturer=Vishay, Manufacturer Part Number=CRCW0402120RFKED, Max Operating Temperature=155°C, Min Operating Temperature=-55°C, Package Height=0.35mm, Package Length=1mm, Package Shape=Rectangular, Package Style=SMTMeter, Package Width=0.5mm, Power=63mW, Rated Temperature=70°C, Resistor Type="FIXED RESISTOR", Supplier Part Number=541-120LCT-ND, Temperature Coefficient=100ppm/°C, Tolerance=1%, Working Voltage=50V, Category="Chip SMD Resistors", ComponentLink1Description=https://datasheet.ciiva.com:443/pdfs/VipMasterIC/IC/VISH/VISH-S-A0007266705/VISH-S-A0007266705-1.pdf?src-supplier=IHS+Markit, ComponentLink1URL=https://datasheet.ciiva.com:443/pdfs/VipMasterIC/IC/VISH/VISH-S-A0007266705/VISH-S-A0007266705-1.pdf?src-supplier=IHS+Markit, ComponentLink2Description=https://datasheet.ciiva.com/11817/0900766b80d98824-11817989.pdf?src-supplier=Rs, ComponentLink2URL=https://datasheet.ciiva.com/11817/0900766b80d98824-11817989.pdf?src-supplier=Rs, ComponentLink3Description=https://datasheet.ciiva.com/2463/dcrcwe3-2463109.pdf?src-supplier=Digikey, ComponentLink3URL=https://datasheet.ciiva.com/2463/dcrcwe3-2463109.pdf?src-supplier=Digikey, ComponentLink4Description=https://datasheet.ciiva.com/2463/dcrcwe3-2463110.pdf?src-supplier=Digikey, ComponentLink4URL=https://datasheet.ciiva.com/2463/dcrcwe3-2463110.pdf?src-supplier=Digikey, ComponentLink5Description=https://datasheet.ciiva.com/2463/dcrcwe3-2463111.pdf?src-supplier=Digikey, ComponentLink5URL=https://datasheet.ciiva.com/2463/dcrcwe3-2463111.pdf?src-supplier=Digikey, ComponentLink6Description=https://datasheet.ciiva.com/8336/dcrcwe3-8336661.pdf?src-supplier=Avnet, ComponentLink6URL=https://datasheet.ciiva.com/8336/dcrcwe3-8336661.pdf?src-supplier=Avnet, ComponentLink7Description=https://datasheet.ciiva.com/3256/dcrcwe3-3256009.pdf?src-supplier=Avnet, ComponentLink7URL=https://datasheet.ciiva.com/3256/dcrcwe3-3256009.pdf?src-supplier=Avnet, ComponentLink8Description=https://datasheet.ciiva.com/5550/dcrcwe3-109170-5550502.pdf?src-supplier=Mouser, ComponentLink8URL=https://datasheet.ciiva.com/5550/dcrcwe3-109170-5550502.pdf?src-supplier=Mouser, ComponentLink9Description=https://datasheet.ciiva.com/22674/1912744-22674687.pdf?src-supplier=Element14, ComponentLink9URL=https://datasheet.ciiva.com/22674/1912744-22674687.pdf?src-supplier=Element14, ComponentLink10Description=https://datasheet.ciiva.com/7777/1697337-7777194.pdf?src-supplier=Element14, ComponentLink10URL=https://datasheet.ciiva.com/7777/1697337-7777194.pdf?src-supplier=Element14, ComponentLink11Description=https://datasheet.ciiva.com/7777/1697337-7777195.pdf?src-supplier=Element14, ComponentLink11URL=https://datasheet.ciiva.com/7777/1697337-7777195.pdf?src-supplier=Element14, ComponentLink12Description=https://datasheet.ciiva.com/16199/dcrcwe3-16199070.pdf?src-supplier=Future+Electronics, ComponentLink12URL=https://datasheet.ciiva.com/16199/dcrcwe3-16199070.pdf?src-supplier=Future+Electronics, Construction=Chip, JESD-609 Code=e3, Mounting Technology="Surface Mount", Packaging="Tape and Reel", Pins=2, Pricing="1=0.1, 10=0.026, 50=0.0164, 100=0.0137, 500=0.00934, 1000=0.00806, 5000=0.00591 (USD)", Reach SVHC Compliant=Yes, Reference Standard=AEC-Q200, RoHS=Yes, RoHS Compliant=Yes, Stock=131111, Supplier=Digikey, Technology="METAL GLAZE/THICK FILM", Terminal Finish=Nickel, Termination=Wraparound
R6 R7: library part AC0402FR-0710KL, "RES SMD 10K OHM 1% 1/16W 0402", Case/Package=0402, LCSC Part Number=C144807, Manufacturer=Yageo, Max Operating Temperature=155°C, Min Operating Temperature=-55°C, Package Height=0.32mm, Package Length=1mm, Package Shape=Rectangular, Package Style=SMTMeter, Package Width=0.5mm, Power=62.5mW, Rated Temperature=70°C, Resistor Type="FIXED RESISTOR", Supplier Part Number=YAG3436CT-ND, Temperature Coefficient=100ppm/°C, Tolerance=1%, Working Voltage=50V, Additional Feature="LASER TRIMMABLE", Category="Chip SMD Resistors", ComponentLink1Description=https://datasheet.ciiva.com:443/pdfs/VipMasterIC/IC/YAGO/YAGO-S-A0003597364/YAGO-S-A0003597364-1.pdf?src-supplier=IHS+Markit, ComponentLink1URL=https://datasheet.ciiva.com:443/pdfs/VipMasterIC/IC/YAGO/YAGO-S-A0003597364/YAGO-S-A0003597364-1.pdf?src-supplier=IHS+Markit, ComponentLink2Description=https://datasheet.ciiva.com/12656/pyu-ac-51-rohs-l-2-12656634.pdf?src-supplier=Mouser, ComponentLink2URL=https://datasheet.ciiva.com/12656/pyu-ac-51-rohs-l-2-12656634.pdf?src-supplier=Mouser, Construction=Chip, JESD-609 Code=e3, Manufacturer Part Number=AC0402FR-0710KL, Mounting Technology="Surface Mount", Packaging="Tape and Reel", Pins=2, Pricing="1=0.1, 10=0.019, 50=0.0116, 100=0.0095, 500=0.00638, 1000=0.00544, 5000=0.00391 (USD)", Reach SVHC Compliant=Yes, Reference Standard=AEC-Q200, RoHS=Yes, RoHS Compliant=Yes, Stock=2309318, Supplier=Digikey, Technology="METAL GLAZE/THICK FILM", Terminal Finish=Nickel, Termination=Wraparound
R8 R9 R10: "RES 1K OHM 1% 1/16W 0402", Case/Package=0402, LCSC Part Number=C106235, Manufacturer=Yageo, Manufacturer Part Number=RC0402FR-071KL, Max Operating Temperature=155°C, Min Operating Temperature=-55°C, Package Height=0.35mm, Package Length=1mm, Package Shape=Rectangular, Package Style=SMTMeter, Package Width=0.5mm, Power=62.5mW, Rated Temperature=70°C, Resistor Type="FIXED RESISTOR", Supplier Part Number=311-1.00KLRCT-ND, Temperature Coefficient=100ppm/°C, Tolerance=1%, Working Voltage=50V, Additional Feature="LASER TRIMMABLE", Category="Chip SMD Resistors", ComponentLink1Description=https://datasheet.ciiva.com:443/pdfs/VipMasterIC/IC/YAGO/YAGO-S-A0008145938/YAGO-S-A0008145938-1.pdf?src-supplier=IHS+Markit, ComponentLink1URL=https://datasheet.ciiva.com:443/pdfs/VipMasterIC/IC/YAGO/YAGO-S-A0008145938/YAGO-S-A0008145938-1.pdf?src-supplier=IHS+Markit, ComponentLink2Description=https://datasheet.ciiva.com/11819/0900766b80c66297-11819477.pdf?src-supplier=Rs, ComponentLink2URL=https://datasheet.ciiva.com/11819/0900766b80c66297-11819477.pdf?src-supplier=Rs, ComponentLink3Description=https://datasheet.ciiva.com/22747/1018594-22747513.pdf?src-supplier=Element14, ComponentLink3URL=https://datasheet.ciiva.com/22747/1018594-22747513.pdf?src-supplier=Element14, ComponentLink4Description=https://datasheet.ciiva.com/12666/pyu-rc0402-51-rohs-l-6-r-12666741.pdf?src-supplier=Mouser, ComponentLink4URL=https://datasheet.ciiva.com/12666/pyu-rc0402-51-rohs-l-6-r-12666741.pdf?src-supplier=Mouser, ComponentLink5Description=https://datasheet.ciiva.com/17063/pyu-rc0402-51-rohs-l-6-r-17063193.pdf?src-supplier=Future+Electronics, ComponentLink5URL=https://datasheet.ciiva.com/17063/pyu-rc0402-51-rohs-l-6-r-17063193.pdf?src-supplier=Future+Electronics, Construction=Chip, JESD-609 Code=e3, Mounting Technology="Surface Mount", Packaging="Tape and Reel", Pins=2, Pricing="1=0.1, 10=0.015, 50=0.0088, 100=0.0073, 500=0.00488, 1000=0.00417, 5000=0.00297 (USD)", Reach SVHC Compliant=Yes, RoHS=Yes, RoHS Compliant=Yes, Stock=7208252, Supplier=Digikey, Technology="METAL GLAZE/THICK FILM", Terminal Finish=Nickel, Termination=Wraparound
U1: "Regulator", Manufacturer=Richtek, Supplier Part Number=1028-RT9013-33GBCT-ND, Category="Voltage Regulators - Linear", ComponentLink1Description=https://datasheet.ciiva.com:443/pdfs/VipMasterIC/IC/RHTK/RHTKS00451/RHTKS00451-1.pdf?src-supplier=IHS+Markit, ComponentLink1URL=https://datasheet.ciiva.com:443/pdfs/VipMasterIC/IC/RHTK/RHTKS00451/RHTKS00451-1.pdf?src-supplier=IHS+Markit, ComponentLink2Description=https://datasheet.ciiva.com/24155/rt9013-12gb-24155563.pdf?src-supplier=Future+Electronics, ComponentLink2URL=https://datasheet.ciiva.com/24155/rt9013-12gb-24155563.pdf?src-supplier=Future+Electronics, ComponentLink3Description=https://datasheet.ciiva.com/22749/1720528-22749449.pdf?src-supplier=Element14, ComponentLink3URL=https://datasheet.ciiva.com/22749/1720528-22749449.pdf?src-supplier=Element14, Manufacturer Part Number=RT9013-33GB, Pricing="1=0.98, 10=0.608, 25=0.5096, 100=0.398, 250=0.34312, 500=0.30952, 1000=0.2815 (USD)", RoHS=Yes, Stock=6493, Supplier=Digikey
U2: "Interface Circuit, 1-Trnsvr, PDSO8", Case/Package=SOP, Manufacturer="NXP Semiconductors", Manufacturer Part Number=TJA1051T/3,118, Max Operating Temperature=125°C, Max Supply Current=70uA, Min Operating Temperature=-40°C, Nominal Supply Voltage=5V, Package Body Material=Plastic, Package Equivalence Code=SOP8,.25, Package Shape=Rectangular, Package Style="SMALL OUTLINEMeter", Supplier Part Number=568-8684-1-ND, Temperature Grade=AUTOMOTIVE, Category="Interface ICs", Channels=1, ComponentLink1Description=https://datasheet.ciiva.com:443/pdfs/VipMasterIC/IC/PHGL/PHGLS22584/PHGLS22584-1.pdf?src-supplier=IHS+Markit, ComponentLink1URL=https://datasheet.ciiva.com:443/pdfs/VipMasterIC/IC/PHGL/PHGLS22584/PHGLS22584-1.pdf?src-supplier=IHS+Markit, Data Rate=1000Mbps, Height - Seated (Max)=1.75mm, JESD-30 Code=R-PDSO-G8, JESD-609 Code=e4, Length=4.9mm, Moisture Sensitivity Level=1, Number of Transceivers=1, Pins=8, Power Supplies=5V, Pricing="1=1.58, 10=1.411, 25=1.3392, 100=1.1001, 250=1.02836, 500=0.90878, 1000=0.71746, 2500=0.66963, 5000=0.63615, 12500=0.61223 (USD)", Qualification Status="Not Qualified", Reach SVHC Compliant=Yes, RoHS=Yes, RoHS Compliant=Yes, Stock=66000, Supplier=Digikey, Surface Mount=Yes, Telecom IC Type="CAN TRANSCEIVER", Terminal Finish=Nickel, Terminal Form="Gull Wing", Terminal Pitch=1.27mm, Terminal Position=DUAL, Width=3.9mm
U3: "Trans Voltage Suppressor Diode, 300W, Unidirectional, 2 Element, Silicon", Manufacturer=MCC, Max Breakdown Voltage=7.2V, Max Operating Temperature=150°C, Min Breakdown Voltage=6.1V, Non-rep Peak Rev Power Dis-Max=300W, Package Body Material=Plastic, Package Shape=Rectangular, Package Style="SMALL OUTLINEMeter", Peak Reflow Temperature (Cel)=260°C, Supplier Part Number=ESDA6V1L-TPCT-ND, Time @ Peak Reflow Temperature-Max (s)=10s, Category="TVS Diodes", ComponentLink1Description=https://datasheet.ciiva.com:443/pdfs/VipMasterIC/IC/MCCC/MCCC-S-A0007919939/MCCC-S-A0007919939-1.pdf?src-supplier=IHS+Markit, ComponentLink1URL=https://datasheet.ciiva.com:443/pdfs/VipMasterIC/IC/MCCC/MCCC-S-A0007919939/MCCC-S-A0007919939-1.pdf?src-supplier=IHS+Markit, ComponentLink2Description=https://datasheet.ciiva.com/4511/esda6v1lsot-23-220527-4511298.pdf?src-supplier=Mouser, ComponentLink2URL=https://datasheet.ciiva.com/4511/esda6v1lsot-23-220527-4511298.pdf?src-supplier=Mouser, ComponentLink3Description=https://datasheet.ciiva.com/335/esda6v1lsot-23-335169.pdf?src-supplier=Digikey, ComponentLink3URL=https://datasheet.ciiva.com/335/esda6v1lsot-23-335169.pdf?src-supplier=Digikey, ComponentLink4Description=https://datasheet.ciiva.com/335/esda6v1lsot-23-335170.pdf?src-supplier=Digikey, ComponentLink4URL=https://datasheet.ciiva.com/335/esda6v1lsot-23-335170.pdf?src-supplier=Digikey, ComponentLink5Description=https://datasheet.ciiva.com/335/esda6v1lsot-23-335171.pdf?src-supplier=Digikey, ComponentLink5URL=https://datasheet.ciiva.com/335/esda6v1lsot-23-335171.pdf?src-supplier=Digikey, Diode Element Material=SILICON, Diode Type="TRANS VOLTAGE SUPPRESSOR", JESD-30 Code=R-PDSO-G3, JESD-609 Code=e3, Manufacturer Part Number=ESDA6V1L-TP, Moisture Sensitivity Level=1, Number of Elements=2, Pins=3, Polarity=Unidirectional, Pricing="1=0.58, 10=0.36, 100=0.23, 500=0.1736, 1000=0.15536 (USD)", Qualification Status="Not Qualified", Reach SVHC Compliant=Yes, RoHS=Yes, RoHS Compliant=Yes, Stock=12959, Supplier=Digikey, Surface Mount=Yes, Technology=AVALANCHE, Terminal Finish=Tin, Terminal Form="Gull Wing", Terminal Position=DUAL